# Altium PCB PCB1.PcbDoc (part 1 of 3)
Units mm, origin at the board's own origin, x right, y up, seen from the top; angles counter-clockwise.
Board outline 68.5 x 51.7 mm, 2 copper layers (Top Layer, Bottom Layer); 40 components, 24 nets, 162 pads, 41 vias.
Unrouted connection lines stored in the file: 2.
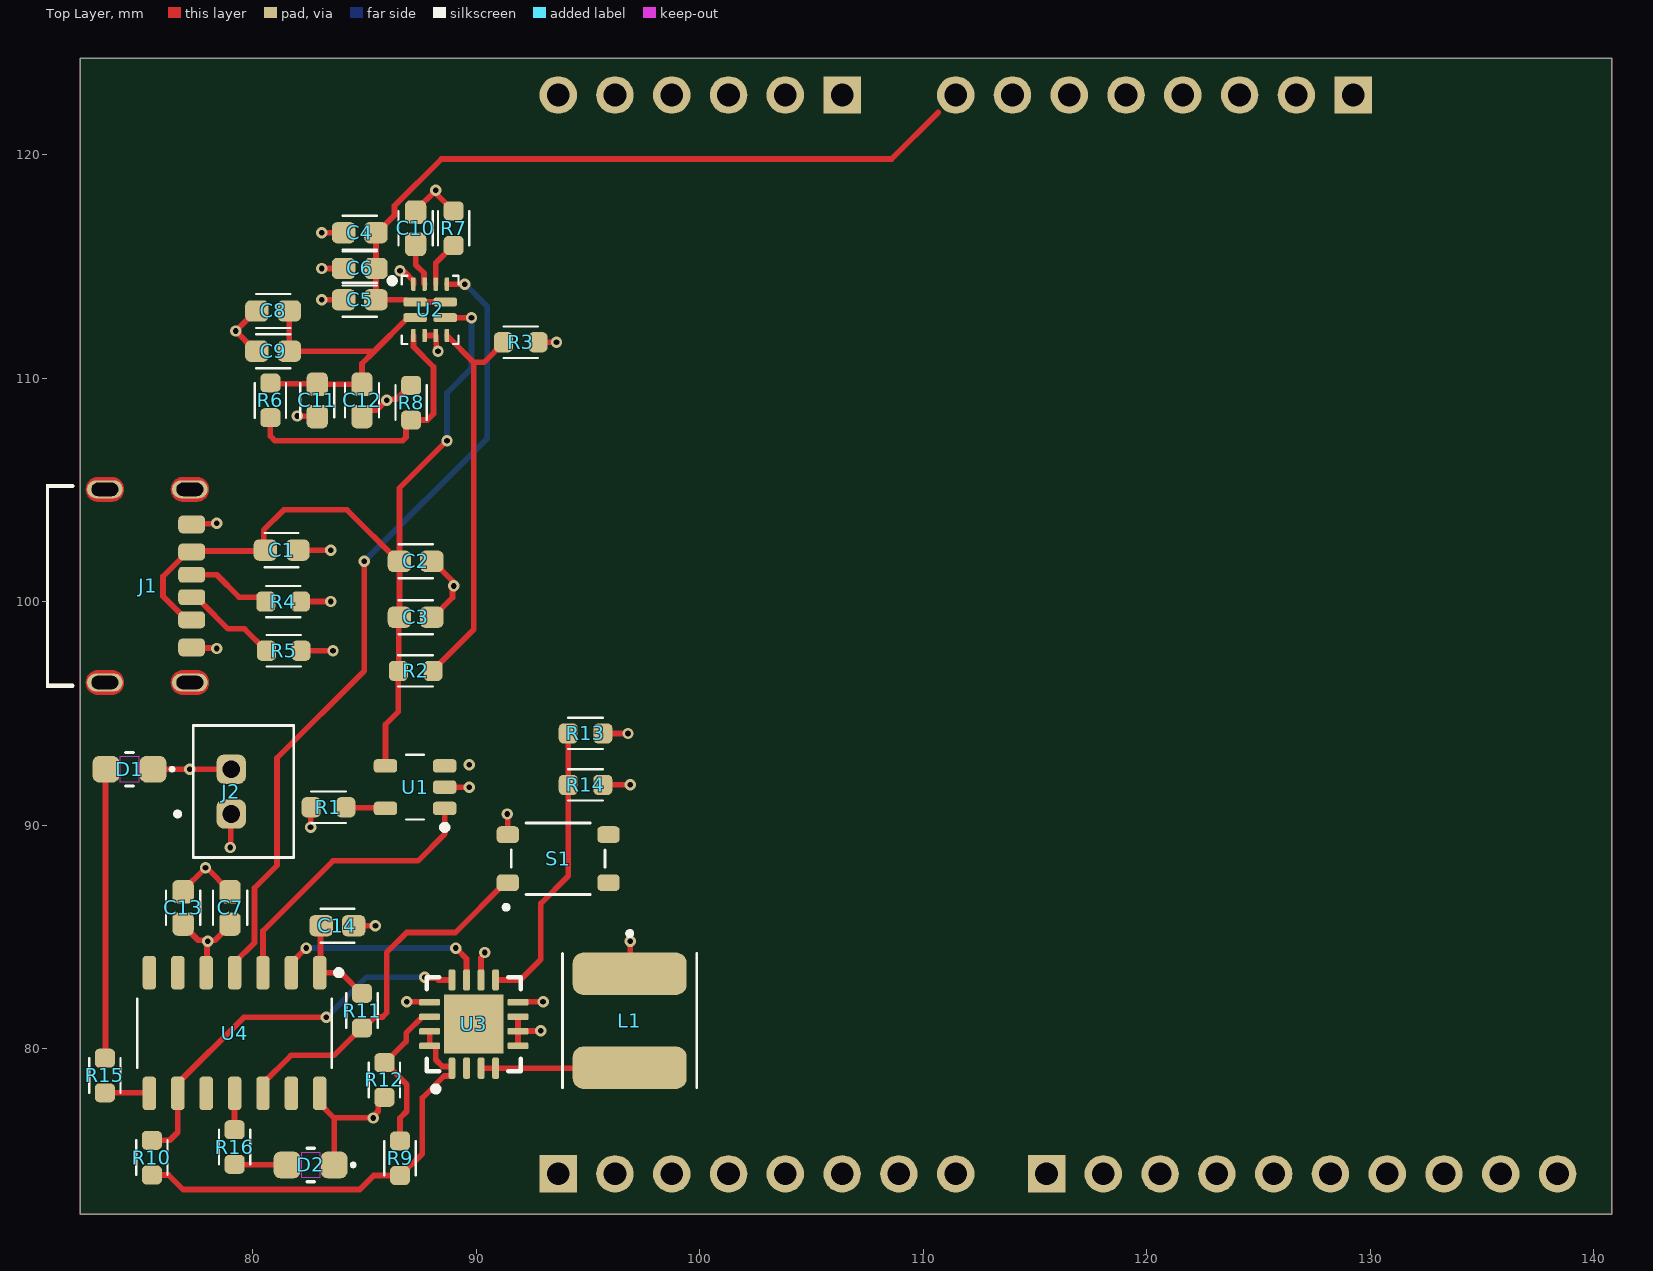
[diagram p0: Top Layer view]
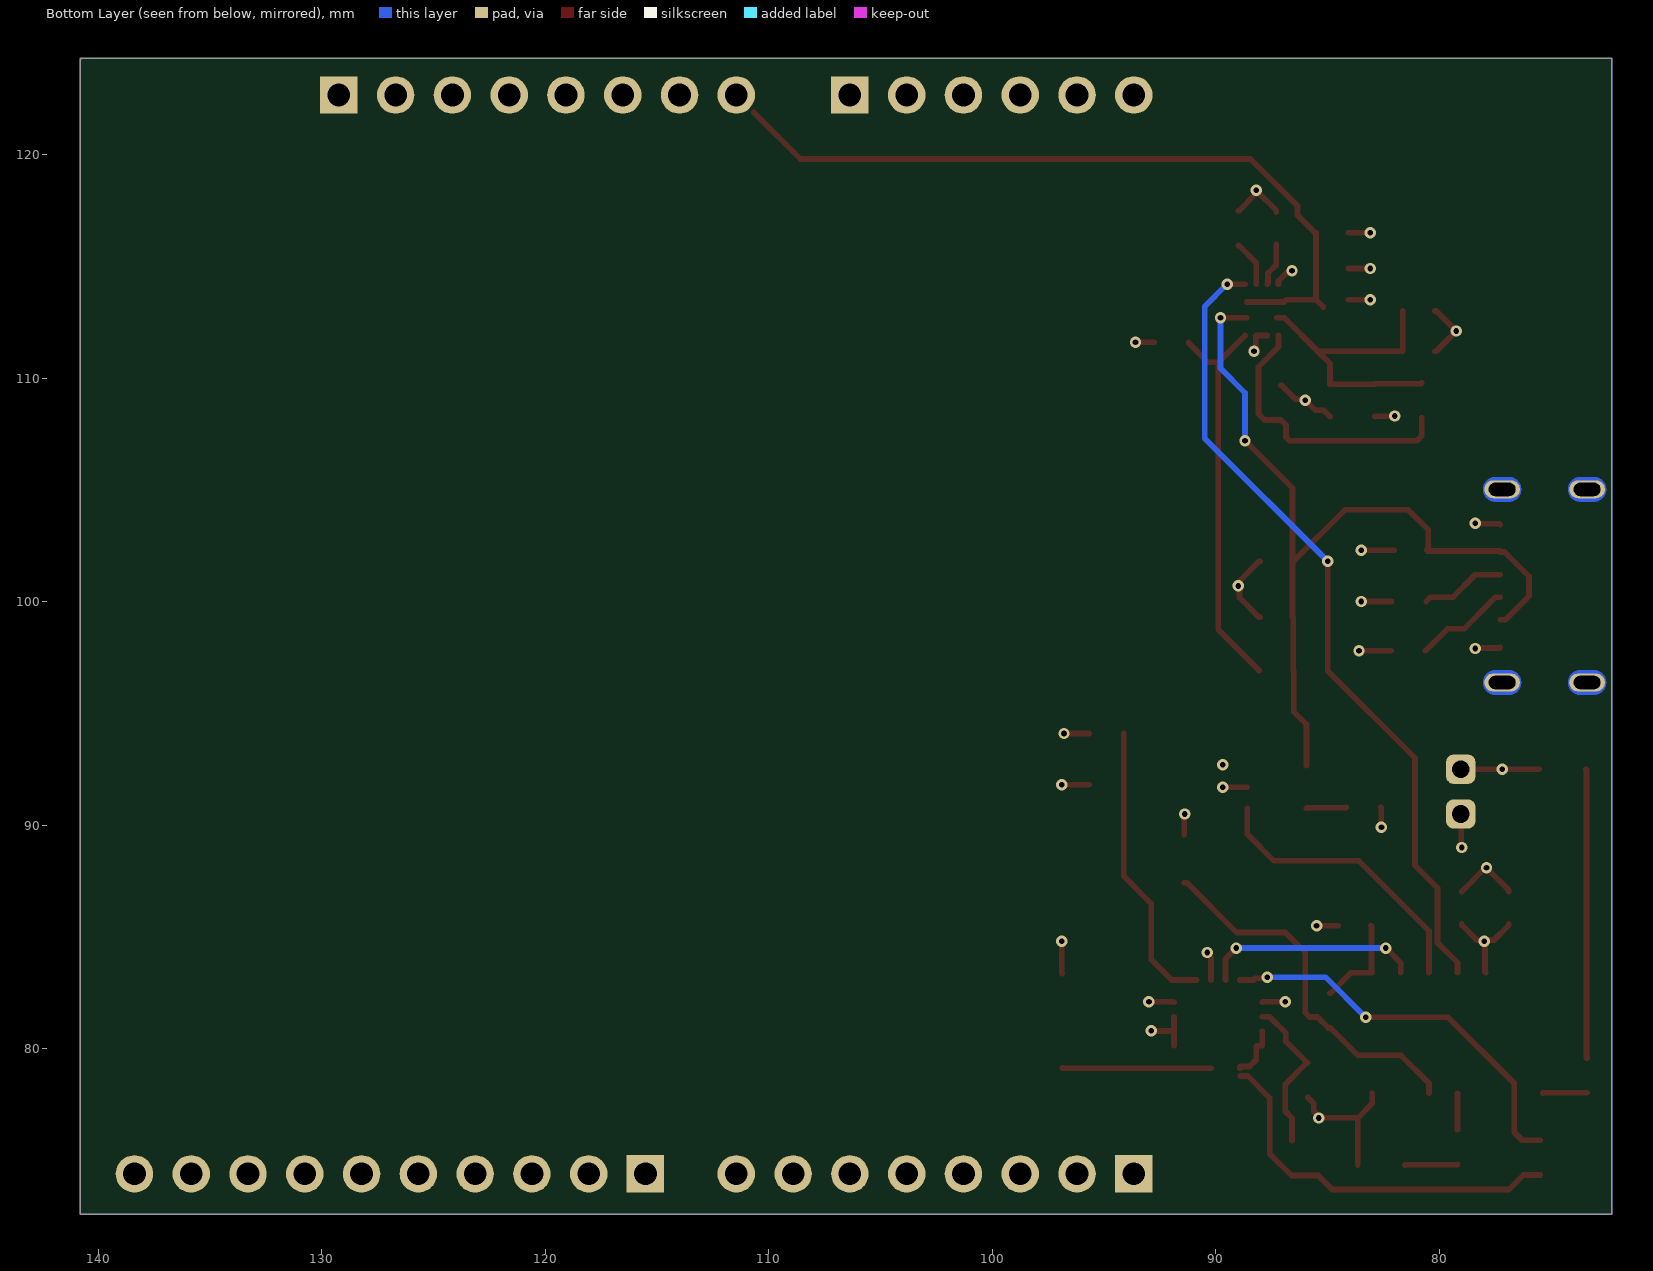
[diagram p1: Bottom Layer view, seen from below]
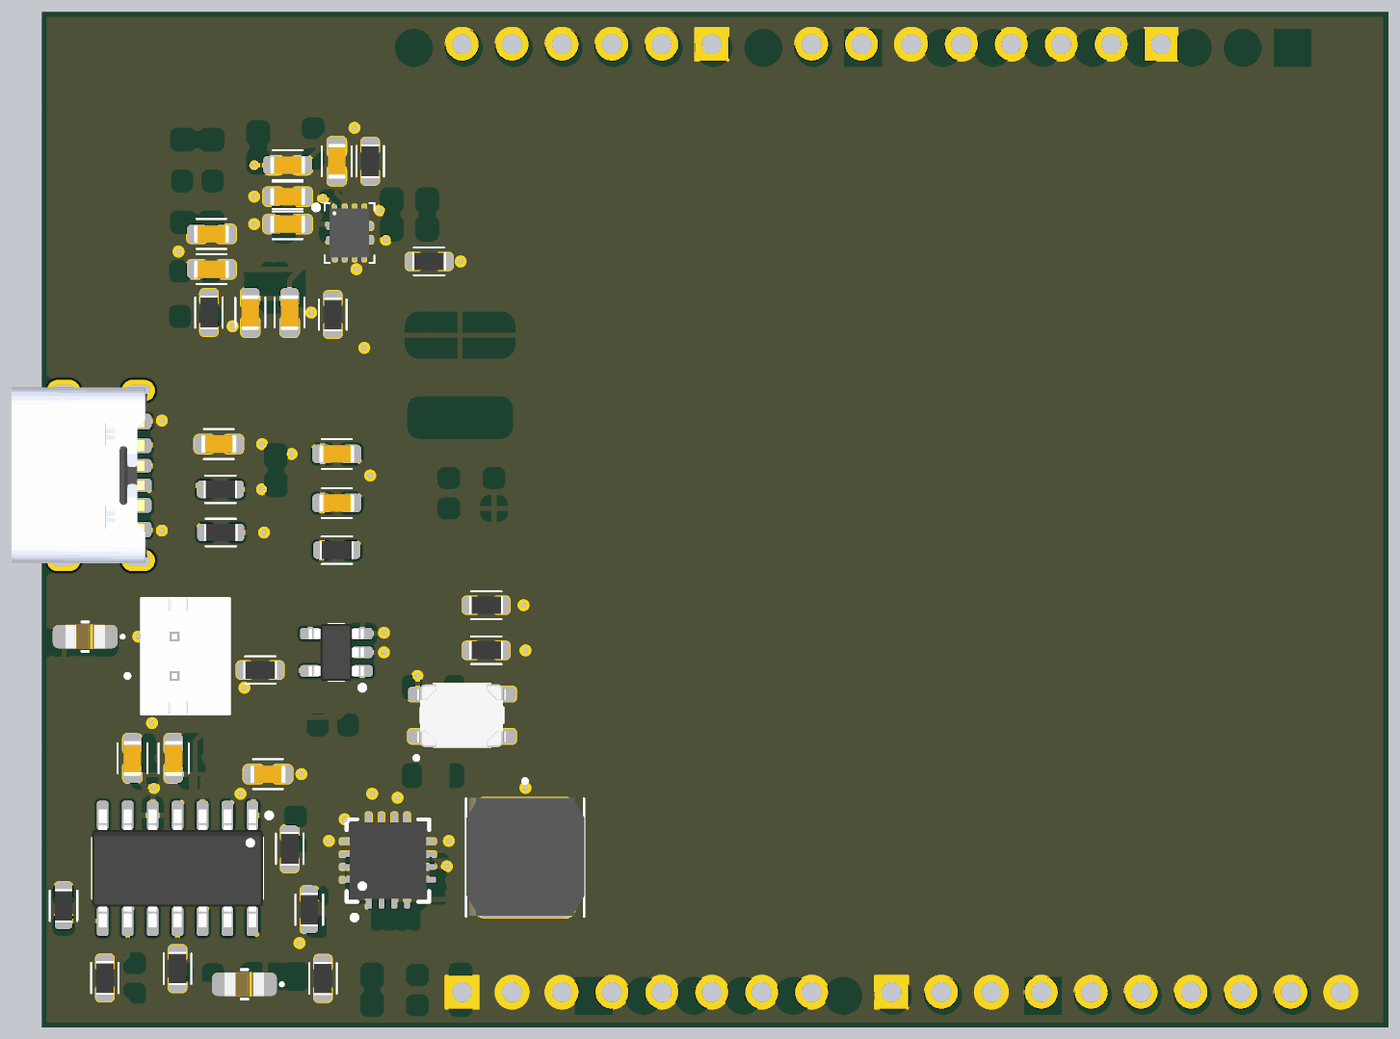
[diagram p2: 3D render of the assembled board from above, using the file's embedded part models]

## Layer stack, top to bottom
Top Solder: solder mask 0.0102, Solder Resist, Dk 3.5
Top Layer: signal copper 0.0356
Dielectric 1: dielectric 0.32, FR-4, Dk 4.8
Bottom Layer: signal copper 0.0356
Bottom Solder: solder mask 0.0102, Solder Resist, Dk 3.5

## Board outline
72.3,72.6 72.3,124.3 140.8,124.3 140.8,72.6

## Design rules (kind name [scope] priority, off if disabled: settings)
BoardOutlineClearance [All] p1: gap=0.25 ignorepadtopadclearanceinfootprint=FALSE
Clearance [All] p1: gap=0.127 ignorepadtopadclearanceinfootprint=FALSE
MinimumSolderMaskSliver [All] p1: minsoldermaskwidth=0.05
PolygonConnect [All] p1: connectstyle=Relief reliefconductorwidth=0.254 reliefentries=4 polygonreliefangle="90 Angle" airgapwidth=0.254
RoutingVias [All] p1: holewidth=0.254 width=0.508 viastyle="Through Hole" minholewidth=0.254 minwidth=0.508 maxholewidth=0.254 maxwidth=0.508
SilkToSilkClearance [All] p1: silktosilkclearance=0.1
SilkToSolderMaskClearance [IsPad] p1: minsilkscreentomaskgap=0.127 clearancetoexposedcopper=TRUE
SolderMaskExpansion [All] p1: expansion=0.05 istentingtop=FALSE
SupplyNets "Schematic Supply Nets_1" [InNet('+5')] p1: voltage=0.000
SupplyNets "Schematic Supply Nets" [InNet('GND')] p2: voltage=0.000
Width [All] p1: maxlimit=0.254 minlimit=0.254 preferedwidth=0.254
27 further rules are at their usual default settings.

## Components (designator, comment, footprint, x,y, rotation, side; value= is the part's Value field where it differs from the comment)
C1 "4.7µF" "C0603 - MURATA" 81.3,102.3 r180 top
C2 "10µF" "C0603 - MURATA" 87.3,101.8 r0 top
C3 "100nF" "C0603 - MURATA" 87.3,99.3 r180 top
C4 "100nF" "C0603 - MURATA" 84.8,116.5 r180 top
C5 "10µF" "C0603 - MURATA" 84.8,113.5 r0 top
C6 "47µF" "C0603 - MURATA" 84.8,114.9 r180 top
C7 "4.7µF" "C0603 - MURATA" 79,86.3 r90 top
C8 "10µF" "C0603 - MURATA" 80.925,113 r180 top
C9 "100nF" "C0603 - MURATA" 80.925,111.2 r0 top
C10 "1µF" "C0603 - MURATA" 87.3,116.7 r90 top
C11 "2.2µF" "C0603 - MURATA" 82.9,109 r270 top
C12 "100nF" "C0603 - MURATA" 84.9,109 r90 top
C13 "10µF" "C0603 - MURATA" 76.9,86.3 r90 top
C14 "100nF" "C0603 - MURATA" 83.8,85.5 r180 top
D1 "LED" "D0805 - LOI" 74.5,92.5 r180 top
D2 "LED" "D0805 - LOI" 82.6,74.8 r180 top
J1 "USB4125-GF-A" GCT_USB4125-GF-A_REVA2 74.2,100.7 r270 top
J2 "B2B-PH-K-S" JST_B2B-PH-K-S 79.6,91.5 r270 top
L1 "VLS6045EX-6R8M" IND_VLS6045EX-6R8M 96.9,81.3 r270 top value=6.8µH
R1 "2kΩ" "R0603 - YAGEO" 83.4,90.8 r0 top
R2 "8.2kΩ" "R0603 - YAGEO" 87.3,96.9 r180 top
R3 "5.1kΩ" "R0603 - YAGEO" 92,111.6 r0 top
R4 "5.1kΩ" "R0603 - YAGEO" 81.375,100 r0 top
R5 "5.1kΩ" "R0603 - YAGEO" 81.4,97.8 r0 top
R6 "10kΩ" "R0603 - YAGEO" 80.8,109 r90 top
R7 "21.5kΩ" "R0603 - YAGEO" 89,116.7 r90 top
R8 "5.1kΩ" "R0603 - YAGEO" 87.1,108.9 r90 top
R9 "1.8MΩ" "R0603 - YAGEO" 86.6,75.1 r90 top
R10 "1MΩ" "R0603 - YAGEO" 75.5,75.125 r90 top
R11 "10kΩ" "R0603 - YAGEO" 84.9,81.7 r270 top
R12 "200kΩ" "R0603 - YAGEO" 85.9,78.6 r270 top
R13 "2.1MΩ" "R0603 - YAGEO" 94.9,94.1 r180 top
R14 "390kΩ" "R0603 - YAGEO" 94.9,91.8 r0 top
R15 "470Ω" "R0603 - YAGEO" 73.4,78.8 r90 top
R16 "470Ω" "R0603 - YAGEO" 79.2,75.6 r270 top
S1 "TL3365AF180QG" SW_TL3365AF180QG 93.6,88.5 r270 top
U1 "MCP73831T-2DCI/OT" "SOT-23-5 - Microchip V2" 87.275,91.7 r180 top
U2 "TPS2121RUXR" 12-QFN 87.95,113.05 r0 top
U3 "TPS61090RSAR" "16-QFN - TI" 89.9,81.1 r90 top
U4 "ATTINY414-SSFR" "14-SOIC - MT V2" 79.2,80.7 r270 top

## Footprints (in the part's own frame and the unit in brackets; to place one, negate y for a bottom-side part, rotate by r counter-clockwise, add the part's x,y. Pads: shape width x height; smd on the part's side, far side on the other; paste and mask are expansions set on the pad)
12-QFN [mm] "TPS2121"
  rrect50% 1.05x0.4 smd: 1(-0.675,0.35) 2(-0.675,-0.35) 7(0.675,-0.35) 8(0.675,0.35)
  rrect50% 0.2x0.6 smd: 3(-0.75,-1.15) 4(-0.25,-1.15) 5(0.25,-1.15) 6(0.75,-1.15) 9(0.75,1.15) 10(0.25,1.15) 11(-0.25,1.15) 12(-0.75,1.15)
  silkscreen extent -1.82,-1.52 1.27,1.52, body extent -1.02,-1.25 0.98,1.25, height 1
"14-SOIC - MT V2" [mm]
  rrect50% 1.5x0.6 smd: 1(-2.7,3.81) 2(-2.7,2.54) 3(-2.7,1.27) 4(-2.7,0) 5(-2.7,-1.27) 6(-2.7,-2.54) 7(-2.7,-3.81) 8(2.7,-3.81) 9(2.7,-2.54) 10(2.7,-1.27) 11(2.7,0) 12(2.7,1.27) 13(2.7,2.54) 14(2.7,3.81)
  silkscreen extent -2.82,-4.35 1.55,4.79, body extent -3,-4.35 3,4.35, height 1.75
"16-QFN - TI" [mm] "QFN, 16-Leads, Body 4,00x4,00mm, Pitch 0,65mm, Thermal Pad 2,65x2,65mm, IPC Medium Density"
  rrect50% 0.95x0.3 smd: 1(-1.975,0.975) 2(-1.975,0.325) 3(-1.975,-0.325) 4(-1.975,-0.975) 9(1.975,-0.975) 10(1.975,-0.325) 11(1.975,0.325) 12(1.975,0.975)
  rrect50% 0.3x0.95 smd: 5(-0.975,-1.975) 6(-0.325,-1.975) 7(0.325,-1.975) 8(0.975,-1.975) 13(0.975,1.975) 14(0.325,1.975) 15(-0.325,1.975) 16(-0.975,1.975)
  rect 2.65x2.65 smd: 17(0,0)
  silkscreen extent -3.02,-2.1 2.1,2.1, body extent -1.95,-1.95 1.95,1.95, height 1
"C0603 - MURATA" [mm]
  rrect50% 1.05x0.95 smd: 1(-0.725,0) 2(0.725,0)
  silkscreen extent -0.76,-0.76 0.76,0.76, body extent -0.9,-0.45 0.9,0.45, height 0.9
"D0805 - LOI" [mil]
  rrect50% 47x47 smd paste+0 mask+0: 1(-41.5,0) 2(41.5,0)
  Top Layer keep-out region: -16,-22.5 -16,22.5 16,22.5 16,-22.5
  silkscreen extent -77,-30 6,30, body extent -39,-25 39,25, height 43
GCT_USB4125-GF-A_REVA2 [mm]
  rrect50% 0.7x1.2 smd: A5(-0.5,3.08) B5(0.5,3.08)
  rrect50% 0.76x1.2 smd: A9(1.52,3.08) B9(-1.52,3.08)
  rrect50% 0.8x1.2 smd: A12(2.75,3.08) B12(-2.75,3.08)
  oval 0.8x1.6 hole 0.6 slot 1.2 at 90 deg mask+0: S1(-4.32,3) S2(4.32,3) S3(-4.32,-0.8) S4(4.32,-0.8)
  Top Layer region: -4.291,0.049 -4.263,0.047 -4.234,0.043 -4.206,0.038 -4.178,0.031 -4.15,0.023 -4.123,0.013 -4.096,0.002 -4.07,-0.01 -4.045,-0.024 -4.02,-0.039 -3.997,-0.055 -3.974,-0.073 -3.952,-0.091 -3.931,-0.111 -3.911,-0.132 -3.893,-0.154 -3.875,-0.177 -3.859,-0.2 -3.844,-0.225 -3.83,-0.25 -3.818,-0.276 -3.807,-0.303 -3.797,-0.33 -3.789,-0.358 -3.782,-0.386 -3.777,-0.414 -3.773,-0.443 -3.771,-0.471 -3.77,-0.5 -3.77,-1.1 -3.771,-1.129 -3.773,-1.157 -3.777,-1.186 -3.782,-1.214 -3.789,-1.242 -3.797,-1.27 -3.807,-1.297 -3.818,-1.324 -3.83,-1.35 -3.844,-1.375 -3.859,-1.4 -3.875,-1.423 -3.893,-1.446 -3.911,-1.468 -3.931,-1.489 -3.952,-1.509 -3.974,-1.527 -3.997,-1.545 -4.02,-1.561 -4.045,-1.576 -4.07,-1.59 -4.096,-1.602 -4.123,-1.613 -4.15,-1.623 -4.178,-1.631 -4.206,-1.638 -4.234,-1.643 -4.263,-1.647 -4.291,-1.649 -4.32,-1.65 -4.349,-1.649 -4.377,-1.647 -4.406,-1.643 -4.434,-1.638 -4.462,-1.631 -4.49,-1.623 -4.517,-1.613 -4.544,-1.602 -4.57,-1.59 -4.595,-1.576 -4.62,-1.561 -4.643,-1.545 -4.666,-1.527 -4.688,-1.509 -4.709,-1.489 -4.729,-1.468 -4.747,-1.446 -4.765,-1.423 -4.781,-1.4 -4.796,-1.375 -4.81,-1.35 -4.822,-1.324 -4.833,-1.297 -4.843,-1.27 -4.851,-1.242 -4.858,-1.214 -4.863,-1.186 -4.867,-1.157 -4.869,-1.129 -4.87,-1.1 -4.87,-0.5 -4.869,-0.471 -4.867,-0.443 -4.863,-0.414 -4.858,-0.386 -4.851,-0.358 -4.843,-0.33 -4.833,-0.303 -4.822,-0.276 -4.81,-0.25 -4.796,-0.225 -4.781,-0.2 -4.765,-0.177 -4.747,-0.154 -4.729,-0.132 -4.709,-0.111 -4.688,-0.091 -4.666,-0.073 -4.643,-0.055 -4.62,-0.039 -4.595,-0.024 -4.57,-0.01 -4.544,0.002 -4.517,0.013 -4.49,0.023 -4.462,0.031 -4.434,0.038 -4.406,0.043 -4.377,0.047 -4.349,0.049 -4.32,0.05
  Top Layer region: -4.291,3.849 -4.263,3.847 -4.234,3.843 -4.206,3.838 -4.178,3.831 -4.15,3.823 -4.123,3.813 -4.096,3.802 -4.07,3.79 -4.045,3.776 -4.02,3.761 -3.997,3.745 -3.974,3.727 -3.952,3.709 -3.931,3.689 -3.911,3.668 -3.893,3.646 -3.875,3.623 -3.859,3.6 -3.844,3.575 -3.83,3.55 -3.818,3.524 -3.807,3.497 -3.797,3.47 -3.789,3.442 -3.782,3.414 -3.777,3.386 -3.773,3.357 -3.771,3.329 -3.77,3.3 -3.77,2.7 -3.771,2.671 -3.773,2.643 -3.777,2.614 -3.782,2.586 -3.789,2.558 -3.797,2.53 -3.807,2.503 -3.818,2.476 -3.83,2.45 -3.844,2.425 -3.859,2.4 -3.875,2.377 -3.893,2.354 -3.911,2.332 -3.931,2.311 -3.952,2.291 -3.974,2.273 -3.997,2.255 -4.02,2.239 -4.045,2.224 -4.07,2.21 -4.096,2.198 -4.123,2.187 -4.15,2.177 -4.178,2.169 -4.206,2.162 -4.234,2.157 -4.263,2.153 -4.291,2.151 -4.32,2.15 -4.349,2.151 -4.377,2.153 -4.406,2.157 -4.434,2.162 -4.462,2.169 -4.49,2.177 -4.517,2.187 -4.544,2.198 -4.57,2.21 -4.595,2.224 -4.62,2.239 -4.643,2.255 -4.666,2.273 -4.688,2.291 -4.709,2.311 -4.729,2.332 -4.747,2.354 -4.765,2.377 -4.781,2.4 -4.796,2.425 -4.81,2.45 -4.822,2.476 -4.833,2.503 -4.843,2.53 -4.851,2.558 -4.858,2.586 -4.863,2.614 -4.867,2.643 -4.869,2.671 -4.87,2.7 -4.87,3.3 -4.869,3.329 -4.867,3.357 -4.863,3.386 -4.858,3.414 -4.851,3.442 -4.843,3.47 -4.833,3.497 -4.822,3.524 -4.81,3.55 -4.796,3.575 -4.781,3.6 -4.765,3.623 -4.747,3.646 -4.729,3.668 -4.709,3.689 -4.688,3.709 -4.666,3.727 -4.643,3.745 -4.62,3.761 -4.595,3.776 -4.57,3.79 -4.544,3.802 -4.517,3.813 -4.49,3.823 -4.462,3.831 -4.434,3.838 -4.406,3.843 -4.377,3.847 -4.349,3.849 -4.32,3.85
  Top Layer region: 4.349,3.849 4.377,3.847 4.406,3.843 4.434,3.838 4.462,3.831 4.49,3.823 4.517,3.813 4.544,3.802 4.57,3.79 4.595,3.776 4.62,3.761 4.643,3.745 4.666,3.727 4.688,3.709 4.709,3.689 4.729,3.668 4.747,3.646 4.765,3.623 4.781,3.6 4.796,3.575 4.81,3.55 4.822,3.524 4.833,3.497 4.843,3.47 4.851,3.442 4.858,3.414 4.863,3.386 4.867,3.357 4.869,3.329 4.87,3.3 4.87,2.7 4.869,2.671 4.867,2.643 4.863,2.614 4.858,2.586 4.851,2.558 4.843,2.53 4.833,2.503 4.822,2.476 4.81,2.45 4.796,2.425 4.781,2.4 4.765,2.377 4.747,2.354 4.729,2.332 4.709,2.311 4.688,2.291 4.666,2.273 4.643,2.255 4.62,2.239 4.595,2.224 4.57,2.21 4.544,2.198 4.517,2.187 4.49,2.177 4.462,2.169 4.434,2.162 4.406,2.157 4.377,2.153 4.349,2.151 4.32,2.15 4.291,2.151 4.263,2.153 4.234,2.157 4.206,2.162 4.178,2.169 4.15,2.177 4.123,2.187 4.096,2.198 4.07,2.21 4.045,2.224 4.02,2.239 3.997,2.255 3.974,2.273 3.952,2.291 3.931,2.311 3.911,2.332 3.893,2.354 3.875,2.377 3.859,2.4 3.844,2.425 3.83,2.45 3.818,2.476 3.807,2.503 3.797,2.53 3.789,2.558 3.782,2.586 3.777,2.614 3.773,2.643 3.771,2.671 3.77,2.7 3.77,3.3 3.771,3.329 3.773,3.357 3.777,3.386 3.782,3.414 3.789,3.442 3.797,3.47 3.807,3.497 3.818,3.524 3.83,3.55 3.844,3.575 3.859,3.6 3.875,3.623 3.893,3.646 3.911,3.668 3.931,3.689 3.952,3.709 3.974,3.727 3.997,3.745 4.02,3.761 4.045,3.776 4.07,3.79 4.096,3.802 4.123,3.813 4.15,3.823 4.178,3.831 4.206,3.838 4.234,3.843 4.263,3.847 4.291,3.849 4.32,3.85
  Top Layer region: 4.349,0.049 4.377,0.047 4.406,0.043 4.434,0.038 4.462,0.031 4.49,0.023 4.517,0.013 4.544,0.002 4.57,-0.01 4.595,-0.024 4.62,-0.039 4.643,-0.055 4.666,-0.073 4.688,-0.091 4.709,-0.111 4.729,-0.132 4.747,-0.154 4.765,-0.177 4.781,-0.2 4.796,-0.225 4.81,-0.25 4.822,-0.276 4.833,-0.303 4.843,-0.33 4.851,-0.358 4.858,-0.386 4.863,-0.414 4.867,-0.443 4.869,-0.471 4.87,-0.5 4.87,-1.1 4.869,-1.129 4.867,-1.157 4.863,-1.186 4.858,-1.214 4.851,-1.242 4.843,-1.27 4.833,-1.297 4.822,-1.324 4.81,-1.35 4.796,-1.375 4.781,-1.4 4.765,-1.423 4.747,-1.446 4.729,-1.468 4.709,-1.489 4.688,-1.509 4.666,-1.527 4.643,-1.545 4.62,-1.561 4.595,-1.576 4.57,-1.59 4.544,-1.602 4.517,-1.613 4.49,-1.623 4.462,-1.631 4.434,-1.638 4.406,-1.643 4.377,-1.647 4.349,-1.649 4.32,-1.65 4.291,-1.649 4.263,-1.647 4.234,-1.643 4.206,-1.638 4.178,-1.631 4.15,-1.623 4.123,-1.613 4.096,-1.602 4.07,-1.59 4.045,-1.576 4.02,-1.561 3.997,-1.545 3.974,-1.527 3.952,-1.509 3.931,-1.489 3.911,-1.468 3.893,-1.446 3.875,-1.423 3.859,-1.4 3.844,-1.375 3.83,-1.35 3.818,-1.324 3.807,-1.297 3.797,-1.27 3.789,-1.242 3.782,-1.214 3.777,-1.186 3.773,-1.157 3.771,-1.129 3.77,-1.1 3.77,-0.5 3.771,-0.471 3.773,-0.443 3.777,-0.414 3.782,-0.386 3.789,-0.358 3.797,-0.33 3.807,-0.303 3.818,-0.276 3.83,-0.25 3.844,-0.225 3.859,-0.2 3.875,-0.177 3.893,-0.154 3.911,-0.132 3.931,-0.111 3.952,-0.091 3.974,-0.073 3.997,-0.055 4.02,-0.039 4.045,-0.024 4.07,-0.01 4.096,0.002 4.123,0.013 4.15,0.023 4.178,0.031 4.206,0.038 4.234,0.043 4.263,0.047 4.291,0.049 4.32,0.05
  Bottom Layer region: -4.291,0.049 -4.263,0.047 -4.234,0.043 -4.206,0.038 -4.178,0.031 -4.15,0.023 -4.123,0.013 -4.096,0.002 -4.07,-0.01 -4.045,-0.024 -4.02,-0.039 -3.997,-0.055 -3.974,-0.073 -3.952,-0.091 -3.931,-0.111 -3.911,-0.132 -3.893,-0.154 -3.875,-0.177 -3.859,-0.2 -3.844,-0.225 -3.83,-0.25 -3.818,-0.276 -3.807,-0.303 -3.797,-0.33 -3.789,-0.358 -3.782,-0.386 -3.777,-0.414 -3.773,-0.443 -3.771,-0.471 -3.77,-0.5 -3.77,-1.1 -3.771,-1.129 -3.773,-1.157 -3.777,-1.186 -3.782,-1.214 -3.789,-1.242 -3.797,-1.27 -3.807,-1.297 -3.818,-1.324 -3.83,-1.35 -3.844,-1.375 -3.859,-1.4 -3.875,-1.423 -3.893,-1.446 -3.911,-1.468 -3.931,-1.489 -3.952,-1.509 -3.974,-1.527 -3.997,-1.545 -4.02,-1.561 -4.045,-1.576 -4.07,-1.59 -4.096,-1.602 -4.123,-1.613 -4.15,-1.623 -4.178,-1.631 -4.206,-1.638 -4.234,-1.643 -4.263,-1.647 -4.291,-1.649 -4.32,-1.65 -4.349,-1.649 -4.377,-1.647 -4.406,-1.643 -4.434,-1.638 -4.462,-1.631 -4.49,-1.623 -4.517,-1.613 -4.544,-1.602 -4.57,-1.59 -4.595,-1.576 -4.62,-1.561 -4.643,-1.545 -4.666,-1.527 -4.688,-1.509 -4.709,-1.489 -4.729,-1.468 -4.747,-1.446 -4.765,-1.423 -4.781,-1.4 -4.796,-1.375 -4.81,-1.35 -4.822,-1.324 -4.833,-1.297 -4.843,-1.27 -4.851,-1.242 -4.858,-1.214 -4.863,-1.186 -4.867,-1.157 -4.869,-1.129 -4.87,-1.1 -4.87,-0.5 -4.869,-0.471 -4.867,-0.443 -4.863,-0.414 -4.858,-0.386 -4.851,-0.358 -4.843,-0.33 -4.833,-0.303 -4.822,-0.276 -4.81,-0.25 -4.796,-0.225 -4.781,-0.2 -4.765,-0.177 -4.747,-0.154 -4.729,-0.132 -4.709,-0.111 -4.688,-0.091 -4.666,-0.073 -4.643,-0.055 -4.62,-0.039 -4.595,-0.024 -4.57,-0.01 -4.544,0.002 -4.517,0.013 -4.49,0.023 -4.462,0.031 -4.434,0.038 -4.406,0.043 -4.377,0.047 -4.349,0.049 -4.32,0.05
  Bottom Layer region: -4.291,3.849 -4.263,3.847 -4.234,3.843 -4.206,3.838 -4.178,3.831 -4.15,3.823 -4.123,3.813 -4.096,3.802 -4.07,3.79 -4.045,3.776 -4.02,3.761 -3.997,3.745 -3.974,3.727 -3.952,3.709 -3.931,3.689 -3.911,3.668 -3.893,3.646 -3.875,3.623 -3.859,3.6 -3.844,3.575 -3.83,3.55 -3.818,3.524 -3.807,3.497 -3.797,3.47 -3.789,3.442 -3.782,3.414 -3.777,3.386 -3.773,3.357 -3.771,3.329 -3.77,3.3 -3.77,2.7 -3.771,2.671 -3.773,2.643 -3.777,2.614 -3.782,2.586 -3.789,2.558 -3.797,2.53 -3.807,2.503 -3.818,2.476 -3.83,2.45 -3.844,2.425 -3.859,2.4 -3.875,2.377 -3.893,2.354 -3.911,2.332 -3.931,2.311 -3.952,2.291 -3.974,2.273 -3.997,2.255 -4.02,2.239 -4.045,2.224 -4.07,2.21 -4.096,2.198 -4.123,2.187 -4.15,2.177 -4.178,2.169 -4.206,2.162 -4.234,2.157 -4.263,2.153 -4.291,2.151 -4.32,2.15 -4.349,2.151 -4.377,2.153 -4.406,2.157 -4.434,2.162 -4.462,2.169 -4.49,2.177 -4.517,2.187 -4.544,2.198 -4.57,2.21 -4.595,2.224 -4.62,2.239 -4.643,2.255 -4.666,2.273 -4.688,2.291 -4.709,2.311 -4.729,2.332 -4.747,2.354 -4.765,2.377 -4.781,2.4 -4.796,2.425 -4.81,2.45 -4.822,2.476 -4.833,2.503 -4.843,2.53 -4.851,2.558 -4.858,2.586 -4.863,2.614 -4.867,2.643 -4.869,2.671 -4.87,2.7 -4.87,3.3 -4.869,3.329 -4.867,3.357 -4.863,3.386 -4.858,3.414 -4.851,3.442 -4.843,3.47 -4.833,3.497 -4.822,3.524 -4.81,3.55 -4.796,3.575 -4.781,3.6 -4.765,3.623 -4.747,3.646 -4.729,3.668 -4.709,3.689 -4.688,3.709 -4.666,3.727 -4.643,3.745 -4.62,3.761 -4.595,3.776 -4.57,3.79 -4.544,3.802 -4.517,3.813 -4.49,3.823 -4.462,3.831 -4.434,3.838 -4.406,3.843 -4.377,3.847 -4.349,3.849 -4.32,3.85
  Bottom Layer region: 4.349,3.849 4.377,3.847 4.406,3.843 4.434,3.838 4.462,3.831 4.49,3.823 4.517,3.813 4.544,3.802 4.57,3.79 4.595,3.776 4.62,3.761 4.643,3.745 4.666,3.727 4.688,3.709 4.709,3.689 4.729,3.668 4.747,3.646 4.765,3.623 4.781,3.6 4.796,3.575 4.81,3.55 4.822,3.524 4.833,3.497 4.843,3.47 4.851,3.442 4.858,3.414 4.863,3.386 4.867,3.357 4.869,3.329 4.87,3.3 4.87,2.7 4.869,2.671 4.867,2.643 4.863,2.614 4.858,2.586 4.851,2.558 4.843,2.53 4.833,2.503 4.822,2.476 4.81,2.45 4.796,2.425 4.781,2.4 4.765,2.377 4.747,2.354 4.729,2.332 4.709,2.311 4.688,2.291 4.666,2.273 4.643,2.255 4.62,2.239 4.595,2.224 4.57,2.21 4.544,2.198 4.517,2.187 4.49,2.177 4.462,2.169 4.434,2.162 4.406,2.157 4.377,2.153 4.349,2.151 4.32,2.15 4.291,2.151 4.263,2.153 4.234,2.157 4.206,2.162 4.178,2.169 4.15,2.177 4.123,2.187 4.096,2.198 4.07,2.21 4.045,2.224 4.02,2.239 3.997,2.255 3.974,2.273 3.952,2.291 3.931,2.311 3.911,2.332 3.893,2.354 3.875,2.377 3.859,2.4 3.844,2.425 3.83,2.45 3.818,2.476 3.807,2.503 3.797,2.53 3.789,2.558 3.782,2.586 3.777,2.614 3.773,2.643 3.771,2.671 3.77,2.7 3.77,3.3 3.771,3.329 3.773,3.357 3.777,3.386 3.782,3.414 3.789,3.442 3.797,3.47 3.807,3.497 3.818,3.524 3.83,3.55 3.844,3.575 3.859,3.6 3.875,3.623 3.893,3.646 3.911,3.668 3.931,3.689 3.952,3.709 3.974,3.727 3.997,3.745 4.02,3.761 4.045,3.776 4.07,3.79 4.096,3.802 4.123,3.813 4.15,3.823 4.178,3.831 4.206,3.838 4.234,3.843 4.263,3.847 4.291,3.849 4.32,3.85
  Bottom Layer region: 4.349,0.049 4.377,0.047 4.406,0.043 4.434,0.038 4.462,0.031 4.49,0.023 4.517,0.013 4.544,0.002 4.57,-0.01 4.595,-0.024 4.62,-0.039 4.643,-0.055 4.666,-0.073 4.688,-0.091 4.709,-0.111 4.729,-0.132 4.747,-0.154 4.765,-0.177 4.781,-0.2 4.796,-0.225 4.81,-0.25 4.822,-0.276 4.833,-0.303 4.843,-0.33 4.851,-0.358 4.858,-0.386 4.863,-0.414 4.867,-0.443 4.869,-0.471 4.87,-0.5 4.87,-1.1 4.869,-1.129 4.867,-1.157 4.863,-1.186 4.858,-1.214 4.851,-1.242 4.843,-1.27 4.833,-1.297 4.822,-1.324 4.81,-1.35 4.796,-1.375 4.781,-1.4 4.765,-1.423 4.747,-1.446 4.729,-1.468 4.709,-1.489 4.688,-1.509 4.666,-1.527 4.643,-1.545 4.62,-1.561 4.595,-1.576 4.57,-1.59 4.544,-1.602 4.517,-1.613 4.49,-1.623 4.462,-1.631 4.434,-1.638 4.406,-1.643 4.377,-1.647 4.349,-1.649 4.32,-1.65 4.291,-1.649 4.263,-1.647 4.234,-1.643 4.206,-1.638 4.178,-1.631 4.15,-1.623 4.123,-1.613 4.096,-1.602 4.07,-1.59 4.045,-1.576 4.02,-1.561 3.997,-1.545 3.974,-1.527 3.952,-1.509 3.931,-1.489 3.911,-1.468 3.893,-1.446 3.875,-1.423 3.859,-1.4 3.844,-1.375 3.83,-1.35 3.818,-1.324 3.807,-1.297 3.797,-1.27 3.789,-1.242 3.782,-1.214 3.777,-1.186 3.773,-1.157 3.771,-1.129 3.77,-1.1 3.77,-0.5 3.771,-0.471 3.773,-0.443 3.777,-0.414 3.782,-0.386 3.789,-0.358 3.797,-0.33 3.807,-0.303 3.818,-0.276 3.83,-0.25 3.844,-0.225 3.859,-0.2 3.875,-0.177 3.893,-0.154 3.911,-0.132 3.931,-0.111 3.952,-0.091 3.974,-0.073 3.997,-0.055 4.02,-0.039 4.045,-0.024 4.07,-0.01 4.096,0.002 4.123,0.013 4.15,0.023 4.178,0.031 4.206,0.038 4.234,0.043 4.263,0.047 4.291,0.049 4.32,0.05
  silkscreen extent -4.47,-3.4 4.47,-2.25, body extent -4.47,-3.45 4.47,3.45, height 3.26
IND_VLS6045EX-6R8M [mm]
  rrect50% 1.9x5.1 smd: 1(-2.05,-0.025) 2(2.15,-0.025)
  silkscreen extent -3.95,-3.03 3.05,2.97, body extent -3,-3 3,3, height 4.5
JST_B2B-PH-K-S [mm]
  rrect50% 1.308x1.308 / inner round 1.308 / far side rrect50% 1.308x1.308 hole 0.8: 1(1,-0.55)
  rrect50% 1.308x1.308 hole 0.8: 2(-1,-0.55)
  silkscreen extent -2.95,-3.05 2.95,2.25, body extent -2.95,-2.25 2.95,2.25, height 6
"R0603 - YAGEO" [mm]
  rrect50% 0.85x0.9 smd: 1(-0.775,0) 2(0.775,0)
  silkscreen extent -0.77,-0.7 0.77,0.7, body extent -0.85,-0.45 0.85,0.45, height 0.55
"SOT-23-5 - Microchip V2" [mm] "SOT23, 5-Leads, Body 2,90x2,80mm, Pitch 0,95mm, IPC Medium Density"
  rrect50% 1.05x0.6 smd: 1(-1.325,0.95) 2(-1.325,0) 3(-1.325,-0.95) 4(1.325,-0.95) 5(1.325,0.95)
  silkscreen extent -1.45,-1.45 0.4,1.92, body extent -1.4,-1.45 1.4,1.45, height 1.45
SW_TL3365AF180QG [mm]
  rrect50% 0.75x1 smd: 1(1.075,-2.175) 2(1.075,2.325) 3(-1.075,-2.175) 4(-1.075,2.325)
  silkscreen extent -1.6,-2.35 2.27,2.17, body extent -1.57,-2.2 1.63,2.3, height 2.52

## Part data
C1 C7: library part "CAP - GENERIC", "Ceramic Capacitor, Ceramic, 10V, 20% +Tol, 20% -Tol, X7R, 15% TC, 4.7uF, Surface Mount, 0603", .Case/Package=0603, .Voltage Rating (DC)=10V, Dielectric Material=Ceramic, Manufacturer=Murata, Manufacturer Lifecycle Status="IN PRODUCTION", Manufacturer Part Number=GRM188Z71A475ME15D, Max Operating Temperature=125°C, Min Operating Temperature=-55°C, Supplier Part Number=490-GRM188Z71A475ME15DCT-ND, Tolerance=20%, Case/Package=0603, Category="Ceramic Capacitors", ComponentLink1Description=https://datasheet.octopart.com:443/GRM188Z71A475ME15D-Murata-datasheet-149523300.pdf?src-supplier=Newark, ComponentLink1URL=https://datasheet.octopart.com:443/GRM188Z71A475ME15D-Murata-datasheet-149523300.pdf?src-supplier=Newark, ComponentLink2Description=https://datasheet.octopart.com:443/GRM188Z71A475ME15D-Murata-datasheet-141276011.pdf?src-supplier=Geoflip, ComponentLink2URL=https://datasheet.octopart.com:443/GRM188Z71A475ME15D-Murata-datasheet-141276011.pdf?src-supplier=Geoflip, ComponentLink3Description=https://datasheet.octopart.com:443/GRM188Z71A475ME15D-Murata-datasheet-165579666.pdf?src-supplier=TME, ComponentLink3URL=https://datasheet.octopart.com:443/GRM188Z71A475ME15D-Murata-datasheet-165579666.pdf?src-supplier=TME, ComponentLink4Description=https://datasheet.octopart.com:443/GRM188Z71A475ME15D-Murata-datasheet-140705914.pdf?src-supplier=Ciiva, ComponentLink4URL=https://datasheet.octopart.com:443/GRM188Z71A475ME15D-Murata-datasheet-140705914.pdf?src-supplier=Ciiva, ComponentLink5Description=https://datasheet.octopart.com:443/GRM188Z71A475ME15D-Murata-datasheet-138743432.pdf?src-supplier=Ciiva, ComponentLink5URL=https://datasheet.octopart.com:443/GRM188Z71A475ME15D-Murata-datasheet-138743432.pdf?src-supplier=Ciiva, ComponentLink6Description=http://sigma.octopart.com:80/reach_statement/Murata-company-16.pdf?src-supplier=Compliance+Statements, ComponentLink6URL=http://sigma.octopart.com:80/reach_statement/Murata-company-16.pdf?src-supplier=Compliance+Statements, Height=800µm, Length=1.6mm, Lifecycle Status=Production, Material=Ceramic, Mounting Technology="Surface Mount", Number of Terminals=2, Pricing="1=0,21, 10=0,122, 50=0,0874, 100=0,0768, 500=0,05886, 1000=0,05334 (USD)", REACH SVHC=Yes, RoHS=Compliant, Stock=107870, Supplier=DigiKey, Supplier 1=DigiKey, Supplier Part Number 1=490-GRM188Z71A475ME15DCT-ND, Thickness=800µm, Voltage Rating=10V, Voltage Rating (DC)=10V, Width=800µm
C2 C5 C8 C13: library part "CAP - GENERIC", "Ceramic Capacitor, Ceramic, 10V, 20% +Tol, 20% -Tol, X5R, 15% TC, 10uF, Surface Mount, 0603", .Case/Package=0603, .Voltage Rating (DC)=10V, Case Code (Metric)=1608, Dielectric=X5R, Dielectric Material=Ceramic, Manufacturer=Murata, Manufacturer Lifecycle Status="IN PRODUCTION", Manufacturer Part Number=GRM188R61A106ME69D, Max Operating Temperature=85°C, Min Operating Temperature=-55°C, Supplier Part Number=490-10475-1-ND, Tolerance=20%, Case Code (Imperial)=0603, Case/Package=0603, Category="Ceramic Capacitors", ComponentLink1Description=https://datasheet.octopart.com:443/GRM188R61A106ME69D-Murata-datasheet-32479577.pdf?src-supplier=Upverter, ComponentLink1URL=https://datasheet.octopart.com:443/GRM188R61A106ME69D-Murata-datasheet-32479577.pdf?src-supplier=Upverter, ComponentLink2Description=https://datasheet.octopart.com:443/GRM188R61A106ME69D-Murata-datasheet-34231353.pdf?src-supplier=Newark, ComponentLink2URL=https://datasheet.octopart.com:443/GRM188R61A106ME69D-Murata-datasheet-34231353.pdf?src-supplier=Newark, ComponentLink3Description=https://datasheet.octopart.com:443/GRM188R61A106ME69D-Murata-datasheet-62317187.pdf?src-supplier=element14+APAC, ComponentLink3URL=https://datasheet.octopart.com:443/GRM188R61A106ME69D-Murata-datasheet-62317187.pdf?src-supplier=element14+APAC, ComponentLink4Description=https://datasheet.octopart.com:443/GRM188R61A106ME69D-Murata-datasheet-179080479.pdf?src-supplier=Arrow.cn, ComponentLink4URL=https://datasheet.octopart.com:443/GRM188R61A106ME69D-Murata-datasheet-179080479.pdf?src-supplier=Arrow.cn, ComponentLink5Description=https://datasheet.octopart.com:443/GRM188R61A106ME69D-Murata-datasheet-165579666.pdf?src-supplier=TME, ComponentLink5URL=https://datasheet.octopart.com:443/GRM188R61A106ME69D-Murata-datasheet-165579666.pdf?src-supplier=TME, ComponentLink6Description=https://datasheet.octopart.com:443/GRM188R61A106ME69D-Murata-datasheet-141274968.pdf?src-supplier=Ciiva, ComponentLink6URL=https://datasheet.octopart.com:443/GRM188R61A106ME69D-Murata-datasheet-141274968.pdf?src-supplier=Ciiva, ComponentLink7Description=https://datasheet.octopart.com:443/GRM188R61A106ME69D-Murata-datasheet-140704423.pdf?src-supplier=Ciiva, ComponentLink7URL=https://datasheet.octopart.com:443/GRM188R61A106ME69D-Murata-datasheet-140704423.pdf?src-supplier=Ciiva, ComponentLink8Description=https://datasheet.octopart.com:443/GRM188R61A106ME69D-Murata-datasheet-138742817.pdf?src-supplier=Ciiva, ComponentLink8URL=https://datasheet.octopart.com:443/GRM188R61A106ME69D-Murata-datasheet-138742817.pdf?src-supplier=Ciiva, ComponentLink9Description=https://datasheet.octopart.com:443/GRM188R61A106ME69D-Murata-datasheet-120101189.pdf?src-supplier=Megastar, ComponentLink9URL=https://datasheet.octopart.com:443/GRM188R61A106ME69D-Murata-datasheet-120101189.pdf?src-supplier=Megastar, ComponentLink10Description=https://datasheet.octopart.com:443/GRM188R61A106ME69D-Murata-datasheet-22122223.pdf?src-supplier=Future+Electronics, ComponentLink10URL=https://datasheet.octopart.com:443/GRM188R61A106ME69D-Murata-datasheet-22122223.pdf?src-supplier=Future+Electronics, ComponentLink11Description=https://datasheet.octopart.com/GRM188R61A106ME69D-Murata-datasheet-12515295.pdf, ComponentLink11URL=https://datasheet.octopart.com/GRM188R61A106ME69D-Murata-datasheet-12515295.pdf, ComponentLink12Description=https://datasheet.octopart.com/GRM188R61A106ME69D-Murata-datasheet-12510076.pdf, ComponentLink12URL=https://datasheet.octopart.com/GRM188R61A106ME69D-Murata-datasheet-12510076.pdf, ComponentLink13Description=https://datasheet.octopart.com/GRM188R61A106ME69D-Murata-datasheet-11978611.pdf, ComponentLink13URL=https://datasheet.octopart.com/GRM188R61A106ME69D-Murata-datasheet-11978611.pdf, ComponentLink14Description=https://datasheet.octopart.com/GRM188R61A106ME69D-Murata-datasheet-10025737.pdf, ComponentLink14URL=https://datasheet.octopart.com/GRM188R61A106ME69D-Murata-datasheet-10025737.pdf, ComponentLink15Description=https://datasheet.octopart.com/GRM188R61A106ME69D-Murata-datasheet-8819587.pdf, ComponentLink15URL=https://datasheet.octopart.com/GRM188R61A106ME69D-Murata-datasheet-8819587.pdf, ComponentLink16Description=https://datasheet.octopart.com/GRM188R61A106ME69D-Murata-datasheet-14401046.pdf, ComponentLink16URL=https://datasheet.octopart.com/GRM188R61A106ME69D-Murata-datasheet-14401046.pdf, ComponentLink17Description=http://sigma.octopart.com:80/reach_statement/Murata-company-16.pdf?src-supplier=Compliance+Statements, ComponentLink17URL=http://sigma.octopart.com:80/reach_statement/Murata-company-16.pdf?src-supplier=Compliance+Statements, Depth=800µm, Height=800µm, Lead Free="Lead Free", Length=1.6mm, Lifecycle Status=Production, Material=Ceramic, Mounting Technology="Surface Mount", Number of Terminals=2, Pins=2, Pricing="1=0,12, 10=0,067, 50=0,0464, 100=0,0401, 500=0,02974, 1000=0,02654 (USD)", REACH SVHC=Yes, RoHS=Compliant, Schedule B="8532240020, 8532240020|8532240020, 8532240020|8532240020|8532240020, 8532240020|8532240020|8532240020|8532240020", Stock=99427, Supplier=DigiKey, Supplier 1=DigiKey, Supplier Part Number 1=490-10475-1-ND, Termination=SMD/SMT, Thickness=800µm, Voltage Rating=10V, Voltage Rating (DC)=10V, Weight=6.293594mg, Width=800µm
C3 C4 C9 C12 C14: library part "CAP - GENERIC", "Cap Ceramic 0.1uF 50V X7R 10% Pad SMD 0603 Soft Termination 125C Automotive T/R", .Case/Package=0603, .Voltage Rating (DC)=50V, Case Code (Metric)=1608, Dielectric=X7R, Dielectric Material=Ceramic, Manufacturer=Murata, Manufacturer Lifecycle Status="IN PRODUCTION", Manufacturer Part Number=GCJ188R71H104KA12D, Max Operating Temperature=125°C, Min Operating Temperature=-55°C, Ratings=AEC-Q200, Supplier Part Number=490-5798-1-ND, Tolerance=10%, Case Code (Imperial)=0603, Case/Package=0603, Category="Ceramic Capacitors", ComponentLink1Description=https://datasheet.octopart.com:443/GCJ188R71H104KA12D-Murata-datasheet-68586835.pdf?src-supplier=Newark, ComponentLink1URL=https://datasheet.octopart.com:443/GCJ188R71H104KA12D-Murata-datasheet-68586835.pdf?src-supplier=Newark, ComponentLink2Description=https://datasheet.octopart.com:443/GCJ188R71H104KA12D-Murata-datasheet-140654765.pdf?src-supplier=Ciiva, ComponentLink2URL=https://datasheet.octopart.com:443/GCJ188R71H104KA12D-Murata-datasheet-140654765.pdf?src-supplier=Ciiva, ComponentLink3Description=https://datasheet.octopart.com:443/GCJ188R71H104KA12D-Murata-datasheet-138714437.pdf?src-supplier=Ciiva, ComponentLink3URL=https://datasheet.octopart.com:443/GCJ188R71H104KA12D-Murata-datasheet-138714437.pdf?src-supplier=Ciiva, ComponentLink4Description=https://datasheet.octopart.com:443/GCJ188R71H104KA12D-Murata-datasheet-165611796.pdf?src-supplier=TME, ComponentLink4URL=https://datasheet.octopart.com:443/GCJ188R71H104KA12D-Murata-datasheet-165611796.pdf?src-supplier=TME, ComponentLink5Description=https://datasheet.octopart.com:443/GCJ188R71H104KA12D-Murata-datasheet-12524712.pdf?src-supplier=Future+Electronics, ComponentLink5URL=https://datasheet.octopart.com:443/GCJ188R71H104KA12D-Murata-datasheet-12524712.pdf?src-supplier=Future+Electronics, ComponentLink6Description=https://datasheet.octopart.com/GCJ188R71H104KA12D-Murata-datasheet-14405607.pdf, ComponentLink6URL=https://datasheet.octopart.com/GCJ188R71H104KA12D-Murata-datasheet-14405607.pdf, ComponentLink7Description=http://sigma.octopart.com:80/reach_statement/Murata-company-16.pdf?src-supplier=Compliance+Statements, ComponentLink7URL=http://sigma.octopart.com:80/reach_statement/Murata-company-16.pdf?src-supplier=Compliance+Statements, Depth=800µm, Features="Soft Termination", Height=800µm, Lead Free="Lead Free", Length=1.6mm, Lifecycle Status=Production, Material=Ceramic, Mounting Technology="Surface Mount", Number of Terminals=2, Packaging="Cut Tape", Pricing="1=0,13, 10=0,072, 50=0,05, 100=0,0434, 500=0,0323, 1000=0,02889 (USD)", Radiation Hardening=No, REACH SVHC=Yes, RoHS=Compliant, Schedule B="8532240020, 8532240020|8532240020, 8532240020|8532240020|8532240020, 8532240020|8532240020|8532240020|8532240020", Stock=2272752, Supplier=DigiKey, Supplier 1=DigiKey, Supplier Part Number 1=490-5798-1-ND, Termination=SMD/SMT, Voltage Rating=50V, Voltage Rating (DC)=50V, Width=800µm
C6: library part "CAP - GENERIC", "6.3V 47uF X5R ±20% 0603 Multilayer Ceramic Capacitors MLCC - SMD/SMT ROHS", .Case/Package=0603, .Voltage Rating (DC)=6.3V, Case Code (Metric)=1608, Dielectric=X5R, Dielectric Material=Ceramic, Manufacturer=Murata, Manufacturer Lifecycle Status="IN PRODUCTION", Manufacturer Part Number=GRM188R60J476ME15D, Max Operating Temperature=85°C, Min Operating Temperature=-55°C, Supplier Part Number=490-13247-1-ND, Tolerance=20%, Case Code (Imperial)=0603, Case/Package=0603, Category="Ceramic Capacitors", ComponentLink1Description=https://datasheet.octopart.com:443/GRM188R60J476ME15D-Murata-datasheet-149523200.pdf?src-supplier=Newark, ComponentLink1URL=https://datasheet.octopart.com:443/GRM188R60J476ME15D-Murata-datasheet-149523200.pdf?src-supplier=Newark, ComponentLink2Description=https://datasheet.octopart.com:443/GRM188R60J476ME15D-Murata-datasheet-165579666.pdf?src-supplier=TME, ComponentLink2URL=https://datasheet.octopart.com:443/GRM188R60J476ME15D-Murata-datasheet-165579666.pdf?src-supplier=TME, ComponentLink3Description=https://datasheet.octopart.com:443/GRM188R60J476ME15D-Murata-datasheet-141274968.pdf?src-supplier=Ciiva, ComponentLink3URL=https://datasheet.octopart.com:443/GRM188R60J476ME15D-Murata-datasheet-141274968.pdf?src-supplier=Ciiva, ComponentLink4Description=https://datasheet.octopart.com:443/GRM188R60J476ME15D-Murata-datasheet-140704401.pdf?src-supplier=Ciiva, ComponentLink4URL=https://datasheet.octopart.com:443/GRM188R60J476ME15D-Murata-datasheet-140704401.pdf?src-supplier=Ciiva, ComponentLink5Description=https://datasheet.octopart.com:443/GRM188R60J476ME15D-Murata-datasheet-138742802.pdf?src-supplier=Ciiva, ComponentLink5URL=https://datasheet.octopart.com:443/GRM188R60J476ME15D-Murata-datasheet-138742802.pdf?src-supplier=Ciiva, ComponentLink6Description=https://datasheet.octopart.com:443/GRM188R60J476ME15D-Murata-datasheet-102370999.pdf?src-supplier=Future+Electronics, ComponentLink6URL=https://datasheet.octopart.com:443/GRM188R60J476ME15D-Murata-datasheet-102370999.pdf?src-supplier=Future+Electronics, ComponentLink7Description=https://datasheet.octopart.com/GRM188R60J476ME15D-Murata-datasheet-12515295.pdf, ComponentLink7URL=https://datasheet.octopart.com/GRM188R60J476ME15D-Murata-datasheet-12515295.pdf, ComponentLink8Description=https://datasheet.octopart.com/GRM188R60J476ME15D-Murata-datasheet-12510076.pdf, ComponentLink8URL=https://datasheet.octopart.com/GRM188R60J476ME15D-Murata-datasheet-12510076.pdf, ComponentLink9Description=https://datasheet.octopart.com/GRM188R60J476ME15D-Murata-datasheet-11978611.pdf, ComponentLink9URL=https://datasheet.octopart.com/GRM188R60J476ME15D-Murata-datasheet-11978611.pdf, ComponentLink10Description=https://datasheet.octopart.com/GRM188R60J476ME15D-Murata-datasheet-10025737.pdf, ComponentLink10URL=https://datasheet.octopart.com/GRM188R60J476ME15D-Murata-datasheet-10025737.pdf, ComponentLink11Description=https://datasheet.octopart.com/GRM188R60J476ME15D-Murata-datasheet-8819587.pdf, ComponentLink11URL=https://datasheet.octopart.com/GRM188R60J476ME15D-Murata-datasheet-8819587.pdf, ComponentLink12Description=http://sigma.octopart.com:80/reach_statement/Murata-company-16.pdf?src-supplier=Compliance+Statements, ComponentLink12URL=http://sigma.octopart.com:80/reach_statement/Murata-company-16.pdf?src-supplier=Compliance+Statements, Height=800µm, Length=1.6mm, Lifecycle Status=Production, Material=Ceramic, Mounting Technology="Surface Mount", Number of Terminals=2, Pricing="1=0,21, 10=0,11 (USD)", REACH SVHC=Yes, RoHS=Compliant, Schedule B="8532240020, 8532240020|8532240020|8532240020|8532240020|8532240020|8532240020|8532240020|8532240020|8532240020|8532240020|8532240020|8532240020|8532240020|8532240020|8532240020|8532240020|8532240020|8532240020|8532240020|8532240020|8532240020|8532240020|8532240020|85", Stock=2045995, Supplier=DigiKey, Supplier 1=DigiKey, Supplier Part Number 1=490-13247-1-ND, Thickness=800µm, Voltage Rating=6.3V, Voltage Rating (DC)=6.3V, Width=800µm
C10: library part "CAP - GENERIC", "Multilayer Ceramic Capacitors MLCC - SMD/SMT 0603 50Vdc 1.0uF X5R 10%", .Case/Package=0603, .Voltage Rating (DC)=50V, Case Code (Metric)=1608, Dielectric=X5R, Dielectric Material=Ceramic, Manufacturer=Murata, Manufacturer Lifecycle Status="IN PRODUCTION", Manufacturer Part Number=GRT188R61H105KE13D, Max Operating Temperature=85°C, Min Operating Temperature=-55°C, Ratings=AEC-Q200, Supplier Part Number=490-12330-1-ND, Tolerance=10%, Case Code (Imperial)=0603, Case/Package=0603, Category="Ceramic Capacitors", ComponentLink1Description=https://datasheet.octopart.com:443/GRT188R61H105KE13D-Murata-datasheet-67697751.pdf?src-supplier=Newark, ComponentLink1URL=https://datasheet.octopart.com:443/GRT188R61H105KE13D-Murata-datasheet-67697751.pdf?src-supplier=Newark, ComponentLink2Description=https://datasheet.octopart.com:443/GRT188R61H105KE13D-Murata-datasheet-149523596.pdf?src-supplier=Newark, ComponentLink2URL=https://datasheet.octopart.com:443/GRT188R61H105KE13D-Murata-datasheet-149523596.pdf?src-supplier=Newark, ComponentLink3Description=https://datasheet.octopart.com:443/GRT188R61H105KE13D-Murata-datasheet-141284650.pdf?src-supplier=Geoflip, ComponentLink3URL=https://datasheet.octopart.com:443/GRT188R61H105KE13D-Murata-datasheet-141284650.pdf?src-supplier=Geoflip, ComponentLink4Description=https://datasheet.octopart.com:443/GRT188R61H105KE13D-Murata-datasheet-165579666.pdf?src-supplier=TME, ComponentLink4URL=https://datasheet.octopart.com:443/GRT188R61H105KE13D-Murata-datasheet-165579666.pdf?src-supplier=TME, ComponentLink5Description=https://datasheet.octopart.com:443/GRT188R61H105KE13D-Murata-datasheet-140711328.pdf?src-supplier=Ciiva, ComponentLink5URL=https://datasheet.octopart.com:443/GRT188R61H105KE13D-Murata-datasheet-140711328.pdf?src-supplier=Ciiva, ComponentLink6Description=https://datasheet.octopart.com:443/GRT188R61H105KE13D-Murata-datasheet-138749128.pdf?src-supplier=Ciiva, ComponentLink6URL=https://datasheet.octopart.com:443/GRT188R61H105KE13D-Murata-datasheet-138749128.pdf?src-supplier=Ciiva, ComponentLink7Description=http://sigma.octopart.com:80/reach_statement/Murata-company-16.pdf?src-supplier=Compliance+Statements, ComponentLink7URL=http://sigma.octopart.com:80/reach_statement/Murata-company-16.pdf?src-supplier=Compliance+Statements, Height=800µm, Length=1.6mm, Lifecycle Status=Production, Material=Ceramic, Mounting Technology="Surface Mount", Number of Terminals=2, Packaging="Cut Tape", Pricing="1=0,14, 10=0,078, 50=0,0546, 100=0,0475, 500=0,0355, 1000=0,03182 (USD)", REACH SVHC=Yes, RoHS=Compliant, Schedule B="8532240020, 8532240020|8532240020, 8532240020|8532240020|8532240020, 8532240020|8532240020|8532240020|8532240020", Stock=586495, Supplier=DigiKey, Supplier 1=DigiKey, Supplier Part Number 1=490-12330-1-ND, Voltage Rating=50V, Voltage Rating (DC)=50V, Width=800µm
C11: library part "CAP - GENERIC", "Ceramic Capacitor, Ceramic, 25V, 10% +Tol, 10% -Tol, X5R, 15% TC, 2.2uF, Surface Mount, 0603", .Case/Package=0603, .Voltage Rating (DC)=25V, Case Code (Metric)=1608, Dielectric=X5R, Dielectric Material=Ceramic, Manufacturer=Murata, Manufacturer Lifecycle Status="IN PRODUCTION", Manufacturer Part Number=GRM188R61E225KA12D, Max Operating Temperature=85°C, Min Operating Temperature=-55°C, Supplier Part Number=490-10731-1-ND, Tolerance=10%, Case Code (Imperial)=0603, Case/Package=0603, Category="Ceramic Capacitors", ComponentLink1Description=https://datasheet.octopart.com:443/GRM188R61E225KA12D-Murata-datasheet-62317198.pdf?src-supplier=element14+APAC, ComponentLink1URL=https://datasheet.octopart.com:443/GRM188R61E225KA12D-Murata-datasheet-62317198.pdf?src-supplier=element14+APAC, ComponentLink2Description=https://datasheet.octopart.com:443/GRM188R61E225KA12D-Murata-datasheet-17853099.pdf?src-supplier=element14+APAC, ComponentLink2URL=https://datasheet.octopart.com:443/GRM188R61E225KA12D-Murata-datasheet-17853099.pdf?src-supplier=element14+APAC, ComponentLink3Description=https://datasheet.octopart.com/GRM188R61E225KA12D-Murata-datasheet-12515295.pdf, ComponentLink3URL=https://datasheet.octopart.com/GRM188R61E225KA12D-Murata-datasheet-12515295.pdf, ComponentLink4Description=https://datasheet.octopart.com/GRM188R61E225KA12D-Murata-datasheet-12510076.pdf, ComponentLink4URL=https://datasheet.octopart.com/GRM188R61E225KA12D-Murata-datasheet-12510076.pdf, ComponentLink5Description=https://datasheet.octopart.com/GRM188R61E225KA12D-Murata-datasheet-11978611.pdf, ComponentLink5URL=https://datasheet.octopart.com/GRM188R61E225KA12D-Murata-datasheet-11978611.pdf, ComponentLink6Description=https://datasheet.octopart.com/GRM188R61E225KA12D-Murata-datasheet-10025737.pdf, ComponentLink6URL=https://datasheet.octopart.com/GRM188R61E225KA12D-Murata-datasheet-10025737.pdf, ComponentLink7Description=https://datasheet.octopart.com/GRM188R61E225KA12D-Murata-datasheet-8819587.pdf, ComponentLink7URL=https://datasheet.octopart.com/GRM188R61E225KA12D-Murata-datasheet-8819587.pdf, ComponentLink8Description=https://datasheet.octopart.com/GRM188R61E225KA12D-Murata-datasheet-14397280.pdf, ComponentLink8URL=https://datasheet.octopart.com/GRM188R61E225KA12D-Murata-datasheet-14397280.pdf, ComponentLink9Description=https://datasheet.octopart.com:443/GRM188R61E225KA12D-Murata-datasheet-165579666.pdf?src-supplier=TME, ComponentLink9URL=https://datasheet.octopart.com:443/GRM188R61E225KA12D-Murata-datasheet-165579666.pdf?src-supplier=TME, ComponentLink10Description=https://datasheet.octopart.com:443/GRM188R61E225KA12D-Murata-datasheet-141274968.pdf?src-supplier=Ciiva, ComponentLink10URL=https://datasheet.octopart.com:443/GRM188R61E225KA12D-Murata-datasheet-141274968.pdf?src-supplier=Ciiva, ComponentLink11Description=https://datasheet.octopart.com:443/GRM188R61E225KA12D-Murata-datasheet-140705128.pdf?src-supplier=Ciiva, ComponentLink11URL=https://datasheet.octopart.com:443/GRM188R61E225KA12D-Murata-datasheet-140705128.pdf?src-supplier=Ciiva, ComponentLink12Description=https://datasheet.octopart.com:443/GRM188R61E225KA12D-Murata-datasheet-138742892.pdf?src-supplier=Ciiva, ComponentLink12URL=https://datasheet.octopart.com:443/GRM188R61E225KA12D-Murata-datasheet-138742892.pdf?src-supplier=Ciiva, ComponentLink13Description=https://datasheet.octopart.com:443/GRM188R61E225KA12D-Murata-datasheet-22122223.pdf?src-supplier=Future+Electronics, ComponentLink13URL=https://datasheet.octopart.com:443/GRM188R61E225KA12D-Murata-datasheet-22122223.pdf?src-supplier=Future+Electronics, ComponentLink14Description=https://datasheet.octopart.com:443/GRM188R61E225KA12D-Murata-datasheet-8817987.pdf?src-supplier=Newark, ComponentLink14URL=https://datasheet.octopart.com:443/GRM188R61E225KA12D-Murata-datasheet-8817987.pdf?src-supplier=Newark, ComponentLink15Description=http://sigma.octopart.com:80/reach_statement/Murata-company-16.pdf?src-supplier=Compliance+Statements, ComponentLink15URL=http://sigma.octopart.com:80/reach_statement/Murata-company-16.pdf?src-supplier=Compliance+Statements, Composition=Ceramic, Depth=800µm, Height=800µm, Lead Free="Lead Free", Length=1.6mm, Lifecycle Status=Production, Material=Ceramic, Mounting Technology="Surface Mount", Number of Terminals=2, Packaging="Cut Tape", Pins=2, Pricing="1=0,1, 10=0,052, 50=0,0356, 100=0,0307, 500=0,02244, 1000=0,01991 (USD)", Radiation Hardening=No, REACH SVHC=Yes, RoHS=Compliant, Schedule B="8532240020, 8532240020|8532240020, 8532240020|8532240020|8532240020, 8532240020|8532240020|8532240020|8532240020", Stock=188068, Supplier=DigiKey, Supplier 1=DigiKey, Supplier Part Number 1=490-10731-1-ND, Termination=SMD/SMT, Thickness=800µm, Voltage=25V, Voltage Rating=25V, Voltage Rating (DC)=25V, Weight=6.293594mg, Width=800µm
D1: "Single-color LEDs; LITEON; LTST-C170KRKT; Red; 130 °; 2 V; 0805", .Case/Package=0805, .Color=Red, Case Code (Metric)=2012, Forward Current=30mA, Forward Voltage=2.4V, Lens Color="Clear, Colorless", Manufacturer=Lite-On, Manufacturer Part Number=LTST-C170KRKT, Max Operating Temperature=85°C, Min Operating Temperature=-55°C, Power Dissipation=75mW, Reverse Voltage=5V, Supplier Part Number=160-1415-1-ND, Test Current=20mA, Case Code (Imperial)=0805, Case/Package=0805, Category=LEDs, China RoHS=Compliant, Color=Red, ComponentLink1Description=https://datasheet.octopart.com:443/LTST-C170KRKT-Lite-On-datasheet-26684674.pdf?src-supplier=Upverter, ComponentLink1URL=https://datasheet.octopart.com:443/LTST-C170KRKT-Lite-On-datasheet-26684674.pdf?src-supplier=Upverter, ComponentLink2Description=https://datasheet.octopart.com:443/LTST-C170KRKT-Lite-On-datasheet-180605146.pdf?src-supplier=IHS, ComponentLink2URL=https://datasheet.octopart.com:443/LTST-C170KRKT-Lite-On-datasheet-180605146.pdf?src-supplier=IHS, ComponentLink3Description=https://datasheet.octopart.com:443/LTST-C170KRKT-Lite-On-datasheet-158436.pdf?src-supplier=_legacy+Avnet, ComponentLink3URL=https://datasheet.octopart.com:443/LTST-C170KRKT-Lite-On-datasheet-158436.pdf?src-supplier=_legacy+Avnet, ComponentLink4Description=https://datasheet.octopart.com:443/LTST-C170KRKT-Lite-On-datasheet-157246157.pdf?src-supplier=ODG+(Origin+Data+Global), ComponentLink4URL=https://datasheet.octopart.com:443/LTST-C170KRKT-Lite-On-datasheet-157246157.pdf?src-supplier=ODG+(Origin+Data+Global), ComponentLink5Description=https://datasheet.octopart.com:443/LTST-C170KRKT-Lite-On-datasheet-166322636.pdf?src-supplier=TME, ComponentLink5URL=https://datasheet.octopart.com:443/LTST-C170KRKT-Lite-On-datasheet-166322636.pdf?src-supplier=TME, ComponentLink6Description=https://datasheet.octopart.com:443/LTST-C170KRKT-Lite-On-datasheet-165573808.pdf?src-supplier=TME, ComponentLink6URL=https://datasheet.octopart.com:443/LTST-C170KRKT-Lite-On-datasheet-165573808.pdf?src-supplier=TME, ComponentLink7Description=https://datasheet.octopart.com:443/LTST-C170KRKT-Lite-On-datasheet-8325281.pdf?src-supplier=Future+Electronics, ComponentLink7URL=https://datasheet.octopart.com:443/LTST-C170KRKT-Lite-On-datasheet-8325281.pdf?src-supplier=Future+Electronics, ComponentLink8Description=https://datasheet.octopart.com:443/LTST-C170KRKT-Lite-On-datasheet-94966.pdf?src-supplier=DigiKey, ComponentLink8URL=https://datasheet.octopart.com:443/LTST-C170KRKT-Lite-On-datasheet-94966.pdf?src-supplier=DigiKey, Depth=1.6mm, Dominant Wavelength=631nm, Height=1.1mm, Illumination Color=Red, Lead Free="Lead Free", Length=3.2mm, Lens Style=Clear, Lens Transparency=Clear, Lifecycle Status=Production, Luminous Intensity=18mcd, Mounting Technology="Surface Mount", Number of Circuits=1, Number of Elements=1, Number of LEDs=1, Number of Terminals=2, Packaging="Cut Tape", Peak Wavelength=639nm, Pins=2, Power Rating=75mW, Pricing="1=0,16, 10=0,111, 100=0,0769, 500=0,0611, 1000=0,05583 (USD)", Radiation Hardening=No, REACH SVHC=Yes, RoHS=Compliant, Schedule B="8541402000, 8541402000|8541402000|8541402000|8541402000|8541402000", Shape=Rectangular, Stock=400623, Supplier=DigiKey, Supplier 1=DigiKey, Supplier Part Number 1=160-1415-1-ND, Terminal Pitch=2.1mm, Viewing Angle=130°, Wavelength=631nm, Width=1.25mm
D2: "Single-color LEDs; LITEON; LTST-C170GKT; Green; 130 °; 2.1 V; 0805", .Case/Package=0805, .Color=Green, Case Code (Metric)=2012, Current=4A, Forward Current=30mA, Forward Voltage=2.6V, Lens Color="Clear, Colorless", Manufacturer=Lite-On, Manufacturer Part Number=LTST-C170GKT, Max Operating Temperature=85°C, Min Operating Temperature=-55°C, Power Dissipation=100mW, Reverse Voltage=5V, Supplier Part Number=160-1179-1-ND, Test Current=10mA, Case Code (Imperial)=0805, Case/Package=0805, Category=LEDs, China RoHS=Compliant, Color=Green, ComponentLink1Description=https://datasheet.octopart.com:443/LTST-C170GKT-Lite-On-datasheet-180605137.pdf?src-supplier=IHS, ComponentLink1URL=https://datasheet.octopart.com:443/LTST-C170GKT-Lite-On-datasheet-180605137.pdf?src-supplier=IHS, ComponentLink2Description=https://datasheet.octopart.com:443/LTST-C170GKT-Lite-On-datasheet-141439001.pdf?src-supplier=Upverter, ComponentLink2URL=https://datasheet.octopart.com:443/LTST-C170GKT-Lite-On-datasheet-141439001.pdf?src-supplier=Upverter, ComponentLink3Description=https://datasheet.octopart.com:443/LTST-C170GKT-Lite-On-datasheet-159307.pdf?src-supplier=Arrow+Electronics, ComponentLink3URL=https://datasheet.octopart.com:443/LTST-C170GKT-Lite-On-datasheet-159307.pdf?src-supplier=Arrow+Electronics, ComponentLink4Description=https://datasheet.octopart.com:443/LTST-C170GKT-Lite-On-datasheet-8330158.pdf?src-supplier=TME, ComponentLink4URL=https://datasheet.octopart.com:443/LTST-C170GKT-Lite-On-datasheet-8330158.pdf?src-supplier=TME, ComponentLink5Description=https://datasheet.octopart.com:443/LTST-C170GKT-Lite-On-datasheet-26684672.pdf?src-supplier=Future+Electronics, ComponentLink5URL=https://datasheet.octopart.com:443/LTST-C170GKT-Lite-On-datasheet-26684672.pdf?src-supplier=Future+Electronics, ComponentLink6Description=https://datasheet.octopart.com:443/LTST-C170GKT-Lite-On-datasheet-59241.pdf?src-supplier=DigiKey, ComponentLink6URL=https://datasheet.octopart.com:443/LTST-C170GKT-Lite-On-datasheet-59241.pdf?src-supplier=DigiKey, ComponentLink7Description=https://datasheet.octopart.com:443/LTST-C170GKT-Lite-On-datasheet-14174986.pdf?src-supplier=iiiC, ComponentLink7URL=https://datasheet.octopart.com:443/LTST-C170GKT-Lite-On-datasheet-14174986.pdf?src-supplier=iiiC, Depth=1.25mm, Dominant Wavelength=569nm, Height=1.1mm, Illumination Color=Green, Lead Free="Lead Free", Length=2mm, Lens Transparency=Clear, Lifecycle Status=Production, Luminous Intensity=6mcd, Mounting Technology="Surface Mount", Number of Circuits=1, Number of Elements=1, Number of LEDs=1, Number of Terminals=2, Packaging="Tape and Reel", Peak Wavelength=565nm, Pins=2, Power Rating=100mW, Pricing="1=0,1, 10=0,066, 100=0,0453, 500=0,03552, 1000=0,03224 (USD)", Radiation Hardening=No, REACH SVHC=Yes, RoHS=Compliant, Schedule B="8541402000, 8541402000|8541402000|8541402000|8541402000|8541402000|8541402000|8541402000|8541402000|8541402000|8541402000|8541402000|8541402000|8541402000|8541402000|8541402000|8541402000|8541402000|8541402000|8541402000|8541402000|8541402000|8541402000|8541402000|85", Shape=Rectangular, Stock=1097965, Supplier=DigiKey, Supplier 1=DigiKey, Supplier Part Number 1=160-1179-1-ND, Terminal Pitch=2.1mm, Viewing Angle=130°, Voltage=5V, Wavelength=569nm, Width=1.25mm